# Altium PCB PCB1.PcbDoc
Units mil, origin at the board's own origin, x right, y up, seen from the top; angles counter-clockwise.
Board outline 2435 x 1585 mil, 2 copper layers (Top Layer, Bottom Layer); 49 components, 28 nets, 130 pads, 0 vias.
Unrouted connection lines stored in the file: 1.
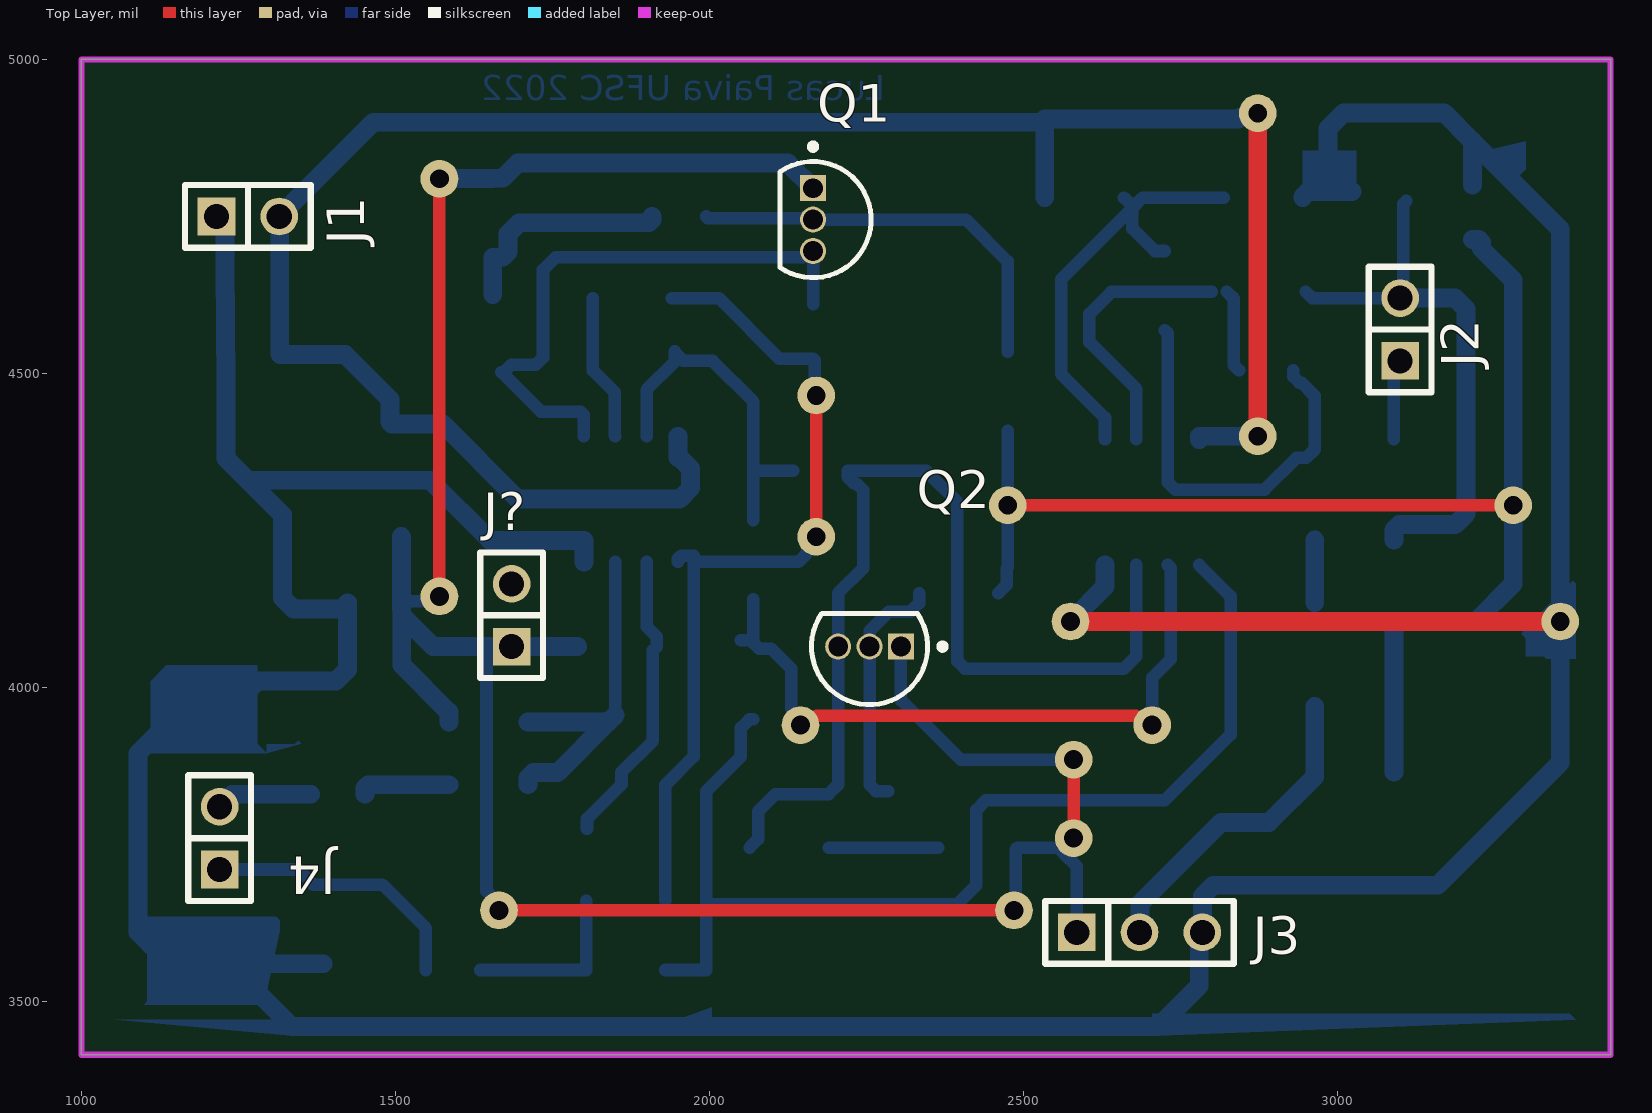
[diagram p0: Top Layer view]
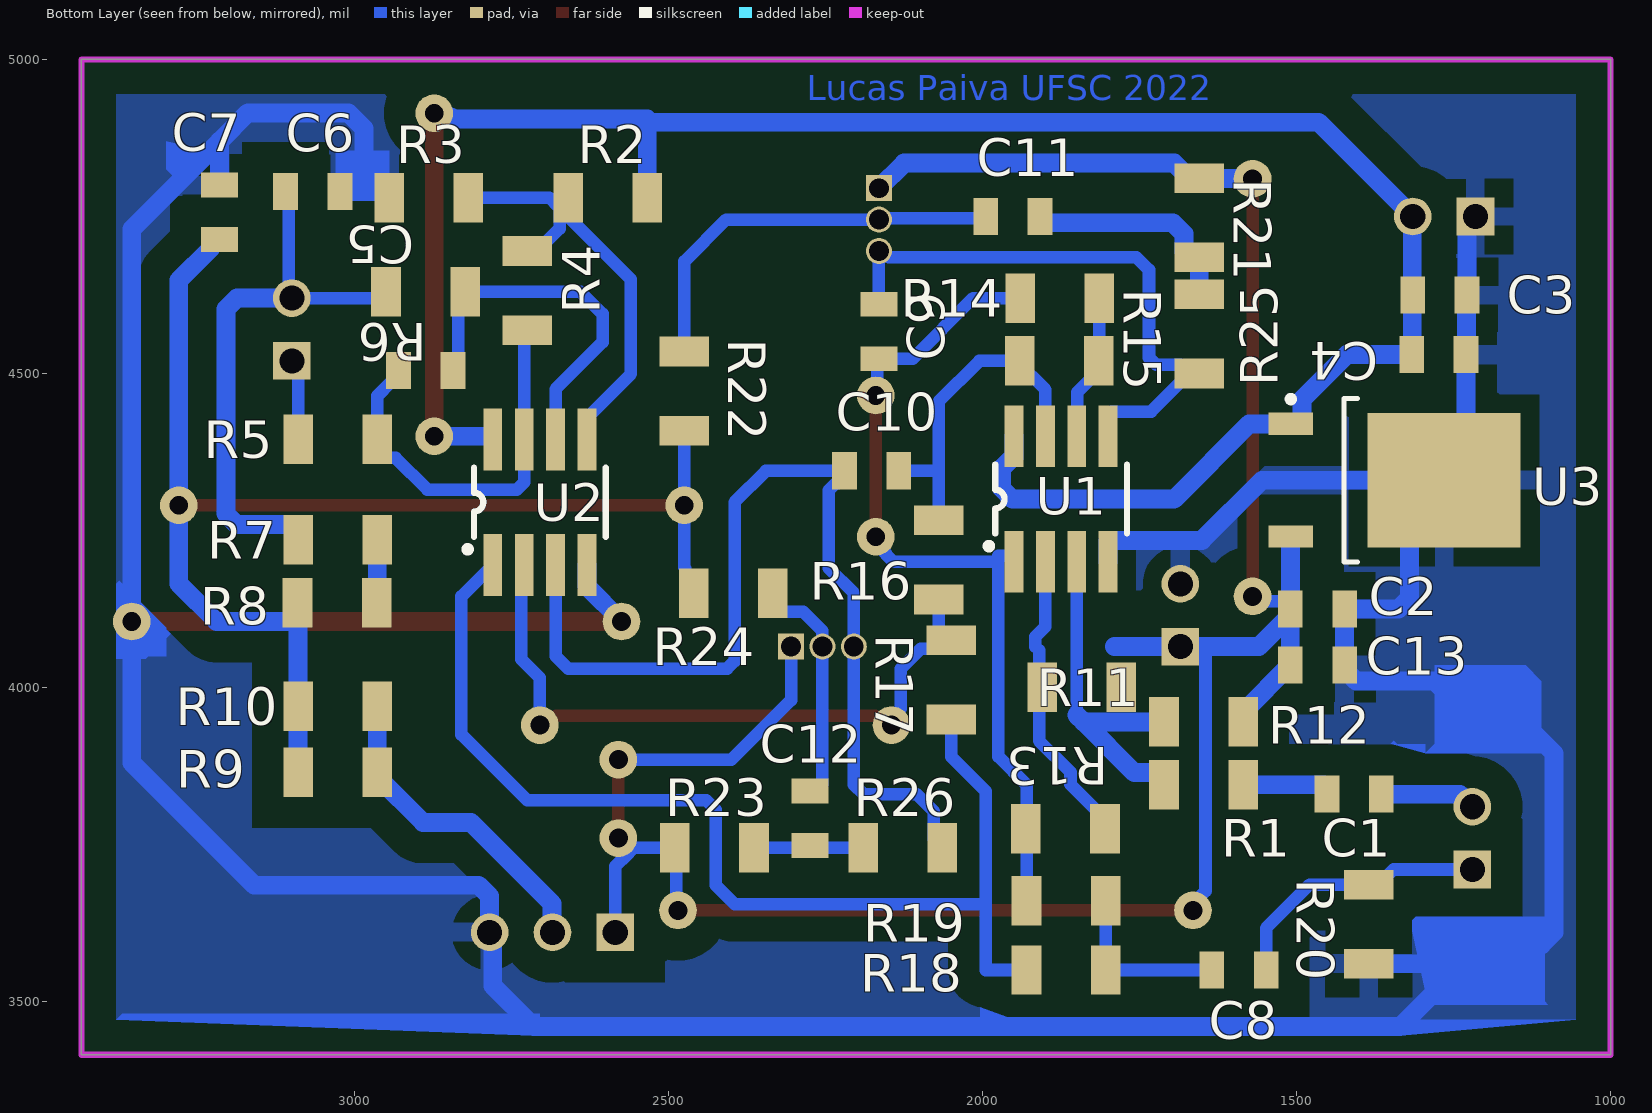
[diagram p1: Bottom Layer view, seen from below]
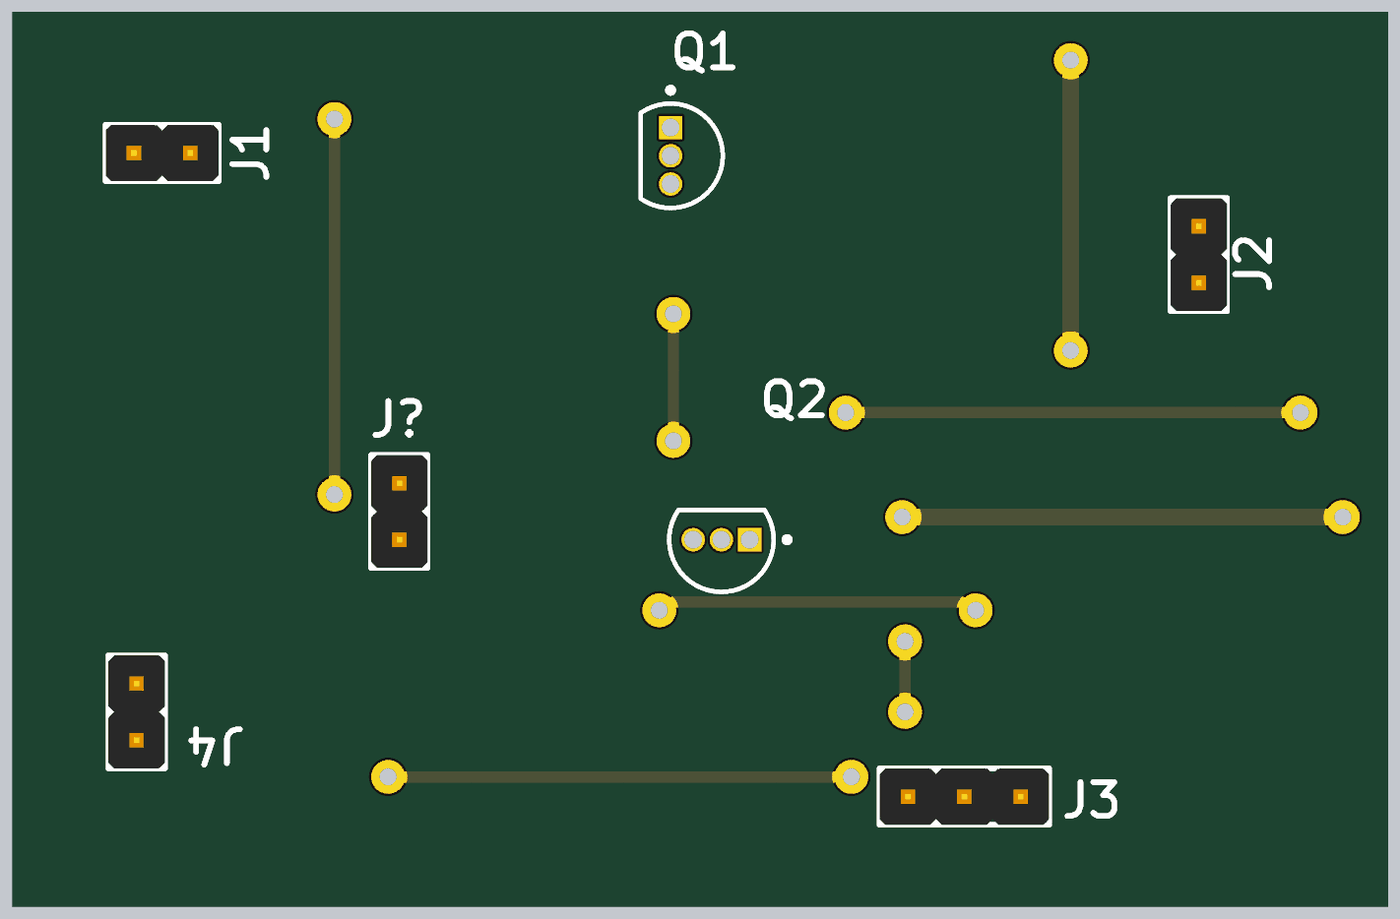
[diagram p2: 3D render of the assembled board from above, using the file's embedded part models]
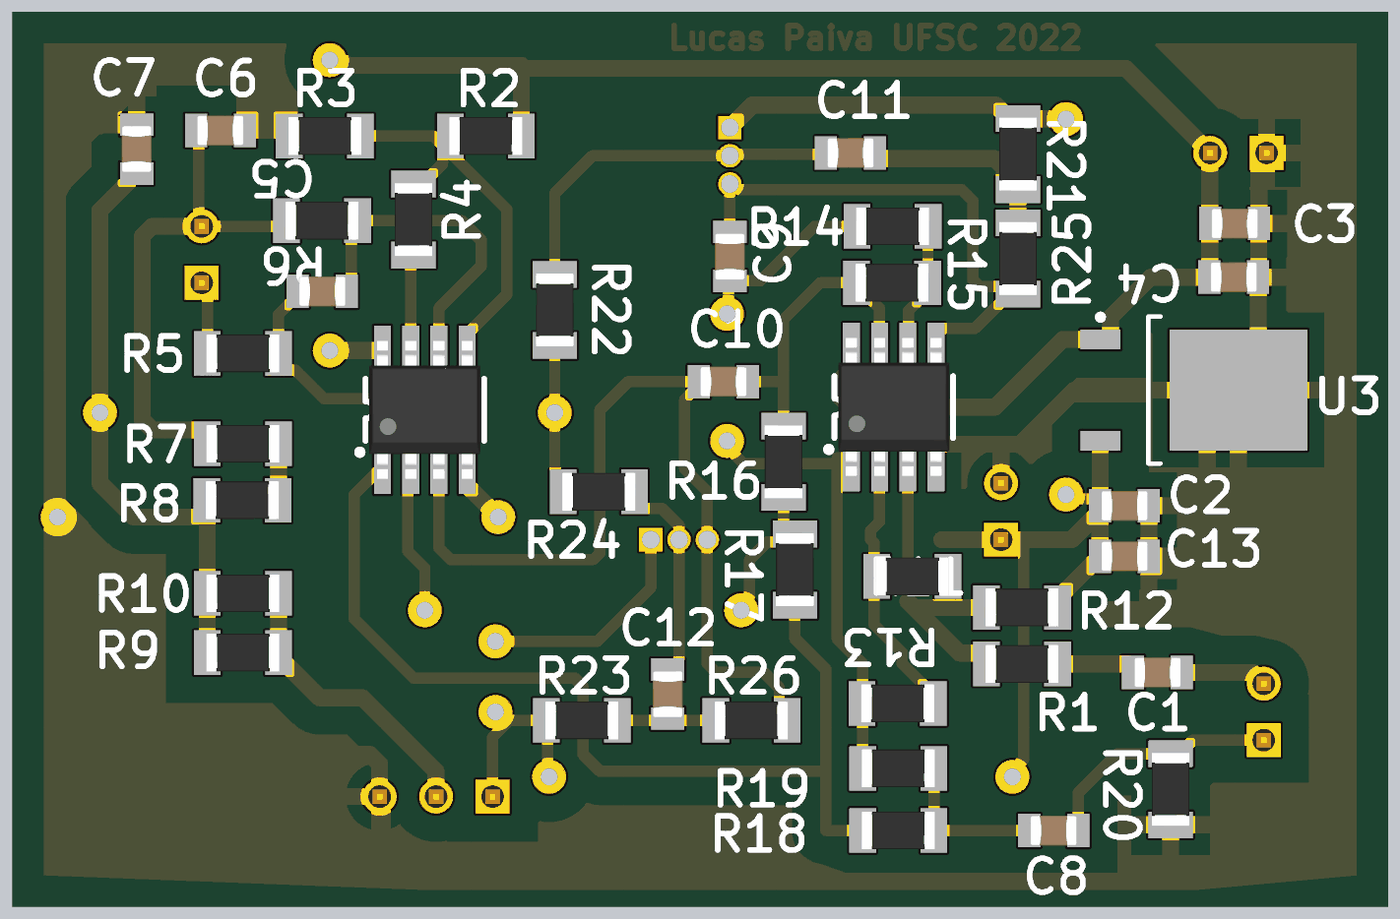
[diagram p3: 3D render of the assembled board from below, using the file's embedded part models]

## Layer stack, top to bottom
Top Solder: solder mask 0.4, Solder Resist, Dk 3.5
Top Layer: signal copper 1.4
Dielectric 1: dielectric 12.6, FR-4, Dk 4.8
Bottom Layer: signal copper 1.4
Bottom Solder: solder mask 0.4, Solder Resist, Dk 3.5

## Board outline
1000,3415 3435,3415 3435,5000 1000,5000

## Design rules (kind name [scope] priority, off if disabled: settings)
Clearance [All] p1: gap=10 ignorepadtopadclearanceinfootprint=FALSE
PlaneClearance [All] p1: clearance=40
PolygonConnect [All] p1: connectstyle=Relief reliefconductorwidth=30 reliefentries=4 polygonreliefangle="90 Angle" airgapwidth=30
RoutingVias [All] p1: holewidth=28 width=50 viastyle="Through Hole" minholewidth=28 minwidth=50 maxholewidth=28 maxwidth=50
SolderMaskExpansion [All] p1: expansion=4 istentingtop=FALSE
Width [All] p1: maxlimit=100 minlimit=20 preferedwidth=35 minimp=50.000000 maximp=50.000000 favimp=50.000000
29 further rules are at their usual default settings.

## Components (designator, comment, footprint, x,y, rotation, side; value= is the part's Value field where it differs from the comment)
C1 "10nF" SMD0805C 1365,3830 r0 bottom
C2 "100nF" SMD0805C 1423.39,4125 r0 bottom
C3 "10uF" SMD0805C 1228.39,4625 r0 bottom
C4 "330nF" SMD0805C 1230,4530 r0 bottom
C5 "10nF" SMD0805C 2843.39,4505 r0 bottom
C6 "10uF" SMD0805C 3110,4789.84 r180 bottom
C7 "50nF" SMD0805C 3215,4800 r270 bottom
C8 "50nF" SMD0805C 1635,3550 r180 bottom
C9 "50nF" SMD0805C 2165,4523.39 r90 bottom
C10 "50nF" SMD0805C 2133.39,4345 r0 bottom
C11 "10nF" SMD0805C 1908.39,4750 r0 bottom
C12 "10nF" SMD0805C 2275,3748.39 r90 bottom
C13 "10uF" SMD0805C 1423.39,4035.75 r0 bottom
J1 "9V In" PIN_HEAD_S_2_2.54 1215,4750 r0 top
J2 "500k Pot" PIN_HEAD_S_2_2.54 3100,4520 r90 top
J3 "250k Pot" PIN_HEAD_S_3_2.54 2585,3610 r0 top
J4 "Audio In" PIN_HEAD_S_2_2.54 1220,3710 r90 top
J? "5V Out" PIN_HEAD_S_2_2.54 1685,4065 r90 top
Q1 "BF244" ONSC-TO-92-3-29-11 2165,4745 r270 top
Q2 "BF244" ONSC-TO-92-3-29-11 2255,4065 r180 top
R1 "10k" SMD1206R 1585,3845 r0 bottom
R2 "150k" SMD1206R 2660,4780 r180 bottom
R3 "150k" SMD1206R 2945,4780 r180 bottom
R4 "150k" SMD1206R 2725,4569.02 r90 bottom
R5 "7k5" SMD1206R 3090,4395 r180 bottom
R6 "150k" SMD1206R 2950,4630 r180 bottom
R7 "2M" SMD1206R 3090,4235 r180 bottom
R8 "2M" SMD1206R 2965,4135 r0 bottom
R9 "2M" SMD1206R 3090,3865 r180 bottom
R10 "2M" SMD1206R 3090,3970 r180 bottom
R11 "20k" SMD1206R 1905,4000 r180 bottom
R12 "470k" SMD1206R 1710.98,3945 r180 bottom
R13 "10k" SMD1206R 1805,3775 r0 bottom
R14 "10k" SMD1206R 1940,4620 r180 bottom
R15 "10k" SMD1206R 1815,4520 r0 bottom
R16 "10k" SMD1206R 2070,4265.98 r270 bottom
R17 "10k" SMD1206R 2050,4075 r270 bottom
R18 "10k" SMD1206R 1930,3550 r180 bottom
R19 "10k" SMD1206R 1930,3660 r180 bottom
R20 "150k" SMD1206R 1385,3560 r90 bottom
R21 "10k" SMD1206R 1655,4685 r90 bottom
R22 "470k" SMD1206R 2475,4535 r270 bottom
R23 "10k" SMD1206R 2364.02,3745 r0 bottom
R24 "470k" SMD1206R 2334.02,4150 r0 bottom
R25 "10k" SMD1206R 1655,4500 r90 bottom
R26 "10k" SMD1206R 2064.02,3745 r0 bottom
U1 "OPA2140" SOIC8 1950,4200 r180 bottom
U2 "OPA2140" SOIC8 2780,4195 r180 bottom
U3 "L78M05CDT-TR" TO-252_L 1343.74,4330 r180 bottom

## Footprints (in the part's own frame and the unit in brackets; to place one, negate y for a bottom-side part, rotate by r counter-clockwise, add the part's x,y. Pads: shape width x height; smd on the part's side, far side on the other; paste and mask are expansions set on the pad)
ONSC-TO-92-3-29-11 [mm] "TO, 3-Leads, Body Dia 4.7mm, Pitch 1.27mm"
  rect 1.05x1.05 hole 0.8: 1(-1.27,0)
  round 1.05 hole 0.8: 2(0,0) 3(1.27,0)
  silkscreen extent -3.07,-1.34 2.35,2.35, body extent -2.35,-1.33 2.36,2.36, height 7.87
PIN_HEAD_S_2_2.54 [mil]
  rect 60x60 hole 40: 1(0,0)
  round 60 hole 40: 2(100,0)
  silkscreen extent -50,-50 150,50, body extent -50,-50 150,50, height 350
PIN_HEAD_S_3_2.54 [mil]
  rect 60x60 hole 40: 1(0,0)
  round 60 hole 40: 2(100,0) 3(200,0)
  silkscreen extent -50,-50 250,50, body extent -50,-50 250,50, height 350
SMD0805C [mm]
  rect 1x1.5 smd: 1(0,0) 2(2.2,0)
  body extent 0.04,-0.67 2.14,0.68, height 0.75
SMD1206R [mm]
  rect 1.2x2 smd: 1(0,0) 2(3.2,0)
  body extent -0.05,-0.85 3.25,0.85, height 0.65
SOIC8 [mil]
  rect 30x98.43 smd: 1(0,0) 2(50,0) 3(100,0) 4(150,0) 5(150,200) 6(100,200) 7(50,200) 8(0,200)
  silkscreen extent -45,20 180,155, body extent -23,-22 173,222, height 69
TO-252_L [mm] "D-PAK, 4-Leads, Body 6.1x6.5mm, Pitch 2.28mm, Lead Span 9.7mm, IPC High Density"
  rect 1.8x0.9 smd: 1(-4.2,2.28) 3(-4.2,-2.28)
  rect 6.2x5.45 smd: 4(2,0)
  silkscreen extent -4.33,-3.3 -1.5,3.4, body extent -2.05,-3.3 4.15,3.3, height 2.4

## Part data
C1 C2 C3 C4 C5 C6 C7 C8 C9 C10 C11 C12 C13: library part Capacitor, "Capacitor"
J1 J2 J4 J?: library part "Header S 2 2.54mm", "PinHead"
J3: library part "Header S 3 2.54mm", "PinHead"
Q1 Q2: library part CMP-1058-00929-1, "Small Signal MOSFET, 500 mA, 60 V, N-Channel, 3-Pin TO-92, Bulk Box", Manufacturer="On Semiconductor", Package Type=TO-92, PartNumber=BS170, Channel Polarity="N Channel", ComponentLink1Description="Manufacturer URL", ComponentLink1URL=http://www.onsemi.com/, ComponentLink2Description=Datasheet, ComponentLink2URL=http://www.onsemi.com/pub_link/Collateral/BS170-D.PDF, ComponentLink3Description="Package Specification", ComponentLink3URL=http://www.onsemi.cn/pub_link/Collateral/2N6426-D.PDF, Configuration=Single, DatasheetVersion="Rev. 6", ID Max (A)=0.5, Mounting Technology="Through Hole", PackageDescription="3-Pin Transistor Outline, Body 4.825 x 3.685 mm, Pitch 1.27 mm", PackageReference=TO-92-3-29-11_AM_SL, PackageVersion="Rev. AM", Packing="Bulk Box", PD Max (W)=0.35, V(BR)DSS Min (V)=60, VGS Max (V)=20, VGS(th) Max (V)=3
R1 R2 R3 R4 R5 R6 R7 R8 R9 R10 R11 R12 R13 R14 R15 R16 R17 R18 R19 R20 R21 R22 R23 R24 R25 R26: library part Resistor, "Resistor 1206 - SMD 0,25W"
U1 U2: "Dual High-precision OPAMP"
U3: library part CMP-0244-00178-1, "Positive Voltage Regulator, 5V, 3-Pin DPAK, Tape and Reel", ComponentLink1Description="Manufacturer URL", ComponentLink1URL=http://www.st.com, ComponentLink2Description=Datasheet, ComponentLink2URL=http://www.st.com/internet/com/TECHNICAL_RESOURCES/TECHNICAL_LITERATURE/DATASHEET/CD00000447.pdf, DatasheetVersion=1/11/2010, PackageDescription="3-Pin Transistor Outline Package 2.28 mm Pitch, 9.7 mm Lead Span (DPAK)", PackageReference=TO-252, PackageVersion=2011

## Free pads (board coordinates)
  round 60 hole 30: 2(2170,4240) 3(2170,4465) 4(2475,4290) 5(3280,4290) 6(2575,4105) 7(3355,4105) 8(2873.28,4400) 9(2873.28,4914.4) 10(1570,4810) 11(1570,4145) 12(1665,3645) 13(2485,3645) 14(2580,3760) 15(2580,3885) 16(2145,3940) 17(2705,3940)

## Nets (pads, with @x,y where several pads share a name; then routed paths per layer and width w, separated by ;. In a path a pad name is that pad's centre, name@x,y a point inside that pad or via, vN(x,y) a via of type N, cw(c..) or ccw(c..) an arc to the next point about the centre after c; other vN are vias at no path point)
+5: C2.2 C13.2 J3.1 J?.1 pad.10 pad.11 pad.12 pad.13 pad.14 pad.15 Q1.1 Q2.1 R11.2 R12.2 R21.2 R23.2 U3.3 | length 4069.3
  Top Layer w20: pad.11 pad.10 ; pad.12 pad.13 ; pad.14 pad.15
  Bottom Layer w20: C2.2@1509.55,4125.45 1509.55,4127.21 1519.69,4137.35 1562.35,4137.35 pad.11 ; 1645,4065 1645,3675.82 1665,3655.82 pad.12 ; Q2.1 2305,3980 2390.03,3894.97 2400,3885 pad.15 ; pad.13 2487.5,3647.5 2487.5,3742.5 R23.2 2555,3745 2560,3740 2564.97,3735.03 2585,3715 J3.1
  Bottom Layer w30: U3.3 1509.55,4239.78 C2.2@1509.55,4127.21 ; C2.2@1509.55,4125.45 C2.2 C2.2@1510,4115.16 ; pad.10 1570.49,4810.49 1654.51,4810.49 R21.2 1670.75,4810.98 1694.76,4835 2125,4835 Q1.1 ; R12.2 1585,3960.75 C13.2 C2.2@1510,4115.16 ; 1790,4065 J?.1 1645,4065 1560.16,4065 C2.2@1510,4115.16
Ain: C1.1 J4.2 | length 153.3
  Bottom Layer w30: J4.2 1240,3830 C1.1
Aout: C8.2 J4.1 R20.2 | length 433.7
  Bottom Layer w20: J4.1 1345.24,3710 1369.25,3685.98 1479.02,3685.98 1548.39,3616.61 C8.2
GND: C2.1 C3.1 C4.1 C6.2 C7.1 C13.1 J1.1 J3.3 J?.2 pad.6 pad.7 R3.1 R20.1 U1.4 U2.4 U3.4 | length 7327.9
  Top Layer w30: pad.6 pad.7
  Bottom Layer w30: J1.1 1228.39,4736.61 C3.1 1229.19,4624.19 1229.19,4530.81 C4.1 1230,4365 U3.4 ; R20.1 1235,3560 ; C13.1@1423.39,4028.39 1405,4010 1280,4010 1200,3930 1125,3930 1090,3895 1090,3610 1110,3590 1205,3590 1235,3560 ; C13.1 C2.1@1423.39,4134.84 ; C2.1 1337.57,4125 1320,4142.57 1320,4275 U3.4 ; U1.4 1800,4234.21 1650.79,4234.21 1555,4330 U3.4 ; pad.6 2575,4105.79 2630,4160.79 U2.4 ; R3.1 2945,4781.22 2953.62,4789.84 2985,4789.84 ; C6.2 2985,4789.84 ; C7.1 3215,4870 ; 1235,3560 1335,3460 2715,3460 2780,3525 2780,3605 J3.3 2785,3667.43 2802.57,3685 3160,3685 3355,3880 pad.7 3355,4730 3215,4870 ; 2985,4789.84 2985,4890 3010,4915 3170,4915 3215,4870
LFO_Out: C7.2 pad.4 pad.5 R8.2 R9.1 R10.1 R22.2 R24.2 | length 2106.2
  Top Layer w20: pad.4 pad.5
  Bottom Layer w20: R24.2 2473.62,4163.62 2473.62,4189.71 2475,4191.09 pad.4 R22.2
  Bottom Layer w30: R9.1 R10.1 3090,4105 3220,4105 3280,4165 pad.5 3280,4648.39 3229.53,4698.86 3229.53,4708.7 3224.84,4713.39 C7.2
NetC1_2: C1.2 R1.1 | length 145.4
  Bottom Layer w30: C1.2 1451.61,3839.84 1456.77,3845 R1.1
NetC5_1: C5.1 R6.2 U2.6 | length 573.6
  Bottom Layer w20: U2.6 2680,4475 2605,4550 2605,4595 2640,4630 2800,4630 ; R6.2 2835,4619.02 2835,4513.39 C5.1
NetC5_2: C5.2 R4.1 R5.2 U2.7 | length 651.6
  Bottom Layer w20: R4.1 2730,4564.02 2730,4326.72 2741.72,4315 2884.02,4315 2934.65,4365.63 2950.39,4365.63 2964.02,4379.25 R5.2 2964.02,4464.37 2942.91,4485.47 2939.69,4485.47 2930,4495.16 C5.2
NetC6_1: C6.1 J2.2 R6.1 R7.1 | length 892.6
  Bottom Layer w20: R6.1 2960,4620 J2.2 3105,4625 3105,4770 C6.1@3110,4775
  Bottom Layer w30: R7.1 3090,4250.75 3098.62,4259.37 3187.43,4259.37 3205,4276.94 3205,4602.43 3187.43,4620 J2.2
NetC8_1: C8.1 R18.2 R19.2 | length 279
  Bottom Layer w20: C8.1 R18.2 R19.2
NetC9_2: C9.2 Q1.3 R25.1 U1.5 | length 936.8
  Bottom Layer w20: U1.5 1800,4434.21 1795,4439.21 1731.54,4439.21 1668.62,4502.13 1672.87,4502.13 1684.37,4513.62 1723.28,4513.62 1735,4525.34 1735,4665 1755,4685 2149.23,4685 2159.23,4695 Q1.3 2165,4685 C9.2
NetC10_2: C10.2 Q2.3 R26.1 U2.3 | length 1629.4
  Bottom Layer w20: R26.1 2077.64,3758.62 2077.64,3802.64 2105,3830 2190,3830 2205,3845 2205,3905 Q2.3 2205,4150 2245,4190 2245,4313.76 2233.28,4325.47 2229.69,4325.47 2220,4335.16 C10.2 2345,4345 2395,4295 2395,4041.72 2406.72,4030 2660,4030 2680,4050 U2.3
NetC11_1: C11.1 R21.1 R25.2 | length 359.3
  Bottom Layer w30: R25.2 R21.1 1670.75,4685 1679.37,4693.62 1679.37,4722.43 1696.94,4740 1903.7,4740 1908.39,4744.69 C11.1
NetC11_2: C11.2 Q1.2 R22.1 | length 653
  Bottom Layer w20: C11.2 1997.5,4747.5 2162.5,4747.5 Q1.2 2408.28,4745 2475,4678.28 R22.1
NetC12_1: C12.1 R23.1 R26.2 | length 174
  Bottom Layer w20: R26.2 2290,3745 R23.1
NetC12_2: C12.2 Q2.2 R24.1 | length 392
  Bottom Layer w20: C12.2@2284.84,3835 C12.2 2265.16,3835 2255.47,3844.69 2255.47,3854.53 2255,3855 2255,4030 2255,4090 2285.63,4120.63 2320.39,4120.63 2334.02,4134.25 R24.1
NetJ2_1: J2.1 R5.1 | length 129.1
  Bottom Layer w20: R5.1 3090,4510 J2.1
NetJ3_2: J3.2 R9.2 R10.2 | length 520.2
  Bottom Layer w30: J3.2 2685.53,3610.53 2685.53,3655.53 2815,3785 2891.14,3785 2964.02,3857.87 R10.2
NetR1_2: R1.2 R12.1 U1.3 | length 563.3
  Bottom Layer w20: 1850,3955.98 U1.3
  Bottom Layer w30: R1.2 1710.98,3855.68 1719.61,3864.3 1758.32,3864.3 1839.02,3945 ; R12.1 1839.02,3945 ; 1850,3955.98 1839.02,3945
NetR2_1: R2.1 R3.2 R4.2 U2.5 | length 716.1
  Bottom Layer w20: U2.5 2630,4429.21 2560,4499.21 2560,4650 R2.1@2673.62,4763.62 ; R2.1 2673.62,4766.38 R2.1@2673.62,4763.62 ; R2.1@2675,4765 2690,4780 R3.2 ; R4.2 2709.25,4695 2673.62,4730.63 R2.1@2673.62,4763.62
NetR7_2: R7.2 R8.1 | length 100
  Bottom Layer w30: R8.1@2964.02,4135 R7.2
NetR11_1: R11.1 R13.1 U1.2 | length 477.6
  Bottom Layer w20: R13.1 1805,3790.75 1860,3845.75 1860,3865 1910,3915 1910,4059.02 1915.98,4065 1915.98,4080.75 1900,4096.73 U1.2
NetR14_2: R14.2 R15.1 U1.6 | length 234.9
  Bottom Layer w20: R14.2 1814.51,4619.51 1814.51,4504.74 1849.25,4470 1849.25,4400.75 U1.6
NetR16_2: pad.16 pad.17 R16.2 R17.1 U2.2 | length 1104.3
  Top Layer w20: pad.16 2155.82,3940 2170.82,3955 2679.18,3955 2694.18,3940 pad.17
  Bottom Layer w20: R17.1 R17.1@2070,4075 ; R16.2 R17.1@2070,4075 ; pad.16 2145,3950.82 2130,3965.82 2130,4030 2098.62,4061.38 2079.37,4061.38 2070,4070.75 R17.1@2070,4075 ; pad.17 2705,4015 2735,4045 2735,4190 U2.2
U1A_Out: C9.1 pad.2 pad.3 R13.2 R14.1 R19.1 U1.1 | length 1360.7
  Top Layer w20: pad.2 pad.3
  Bottom Layer w20: R19.1 1930,3775 1930,3845 1975,3890 1975,4210 1955,4210 1950,4205 U1.1 ; R14.1 2015,4620 2111.61,4523.39 C9.1 2167.5,4520.89 2167.5,4467.5 pad.3 ; 1975,4200 2141.72,4200 2153.43,4211.72 2153.43,4212.61 2162.54,4221.72 pad.2@2175,4221.72
U1B_Out: C10.1 R15.2 R16.1 U1.7 | length 565.7
  Bottom Layer w20: U1.7 1900,4474.25 1945,4519.25 R15.2@1945,4533.62 ; R15.2@1945,4535 R15.2@1945,4533.62 ; R16.1 2070,4350 ; C10.1 2075,4345 2070,4350 ; R15.2@1945,4533.62 1958.62,4520 2005,4520 2070,4455 2070,4350
U2A_Out: R17.2 R18.1 U2.1 | length 1806.7
  Bottom Layer w20: R18.1 1995,3550 1995,3655 ; R17.2@2070,3949.02 2063.62,3949.02 2050,3935.39 2050,3890 1995,3835 1995,3655 ; U2.1 2830,4145 2830,3925 2725,3820 2440,3820 2425,3805 2425,3685 2395,3655 1995,3655
VCC: C3.2 C4.2 J1.2 pad.8 pad.9 R2.2 U1.8 U2.8 U3.1 | length 3447
  Top Layer w30: pad.8 pad.9
  Bottom Layer w30: U1.8 1950,4365.79 1952.43,4365.79 1970,4348.21 1970,4317.57 1952.43,4300 1695,4300 1575.24,4419.76 U3.1 1493.99,4419.76 1491.27,4422.48 1491.27,4458.73 1420,4530 C4.2 1315.81,4530.81 1315.81,4625 1315.81,4749.19 J1.2 1465,4900 2534.02,4900 R2.2 ; 2534.02,4905 2842.67,4905 2846.33,4908.66 2867.54,4908.66 pad.9 ; U2.8 2780,4400 pad.8

## Polygon pours and split planes (outlines as drawn)
GND on Bottom Layer "GND_L02_P000" (solid, remove dead copper, pour order 0): 1000,5000 1000,3415 3435,3415 3430,3420 3430,5000

## Keep-outs
Keep-Out Layer:
  the board outline again, w10

## Other copper
Bottom Layer:
  region net GND: 1315.63,3612.36 1315.63,3629.37 1310,3635 1105,3635 1105,3500 1100,3495 1290,3495
  region net GND: 1260,3895.31 1259.69,3895 1110,3895 1110,4010 1135,4035 1280,4035 1280,3910.63 1295.32,3895.31
  region net GND: 3379.53,3470.47 3370,3480 2705,3480 2705,3455 2715,3445
  region net GND: 1055.47,3470.47 1309.53,3470.47 1335,3445
  region net GND: 1295.32,3895.31 1295.32,3909.53 1339.53,3909.53 1345,3915 1350,3910
  region net GND: 2003.62,3490.56 2003.62,3470.47 1999.1,3475 1960,3475
  region net GND: 3292.76,4085.4 3332.45,4045.72 3355.99,4045.72 3355.99,4084.01 3337.5,4102.5 3337.5,4132.5
  region net GND: 3292.76,4085.4 3332.45,4045.72 3379.53,4045.72 3379.53,4165.47 3375,4170 3300,4095 3300,4050 3334.8,4050 3335,4049.8 3335,4080 3315,4080 3305,4090
  region net GND: 3215,4850 3235,4850 3280,4805 3300,4825 3300,4870
  region net GND: 2945,4855 2945,4780 3025,4780 3030,4785 3030,4855
  text "Lucas Paiva UFSC 2022" at 2280,4935 h40